# Altium PCB sensors11.PcbDoc
Units mm, origin at the board's own origin, x right, y up, seen from the top; angles counter-clockwise.
Board outline 100 x 100 mm, 2 copper layers (Top Layer, Bottom Layer); 17 components, 18 nets, 105 pads, 0 vias.
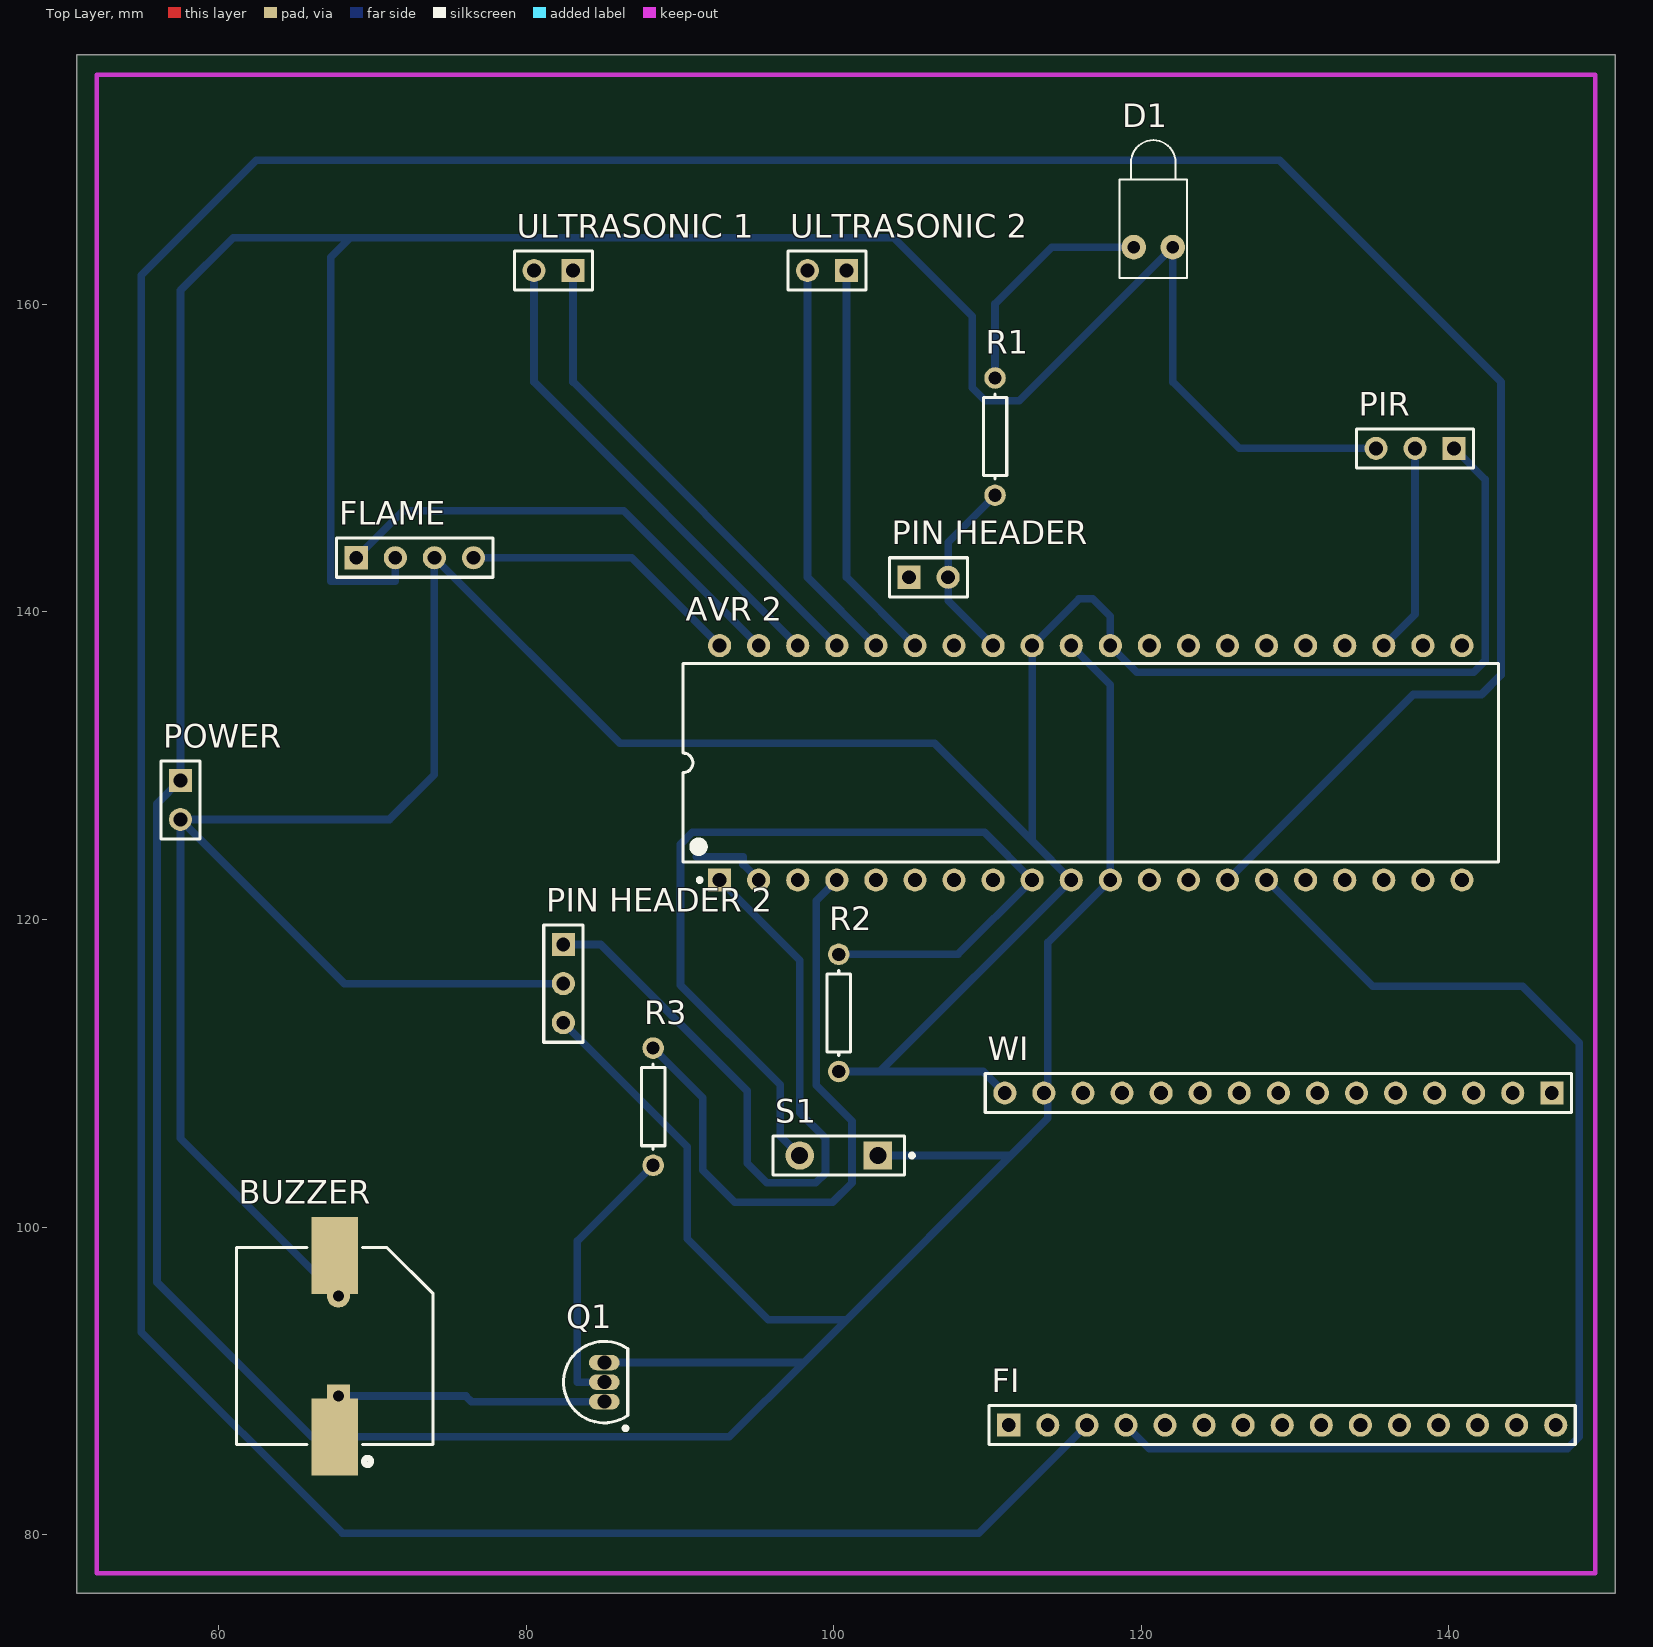
[diagram p0: Top Layer view]
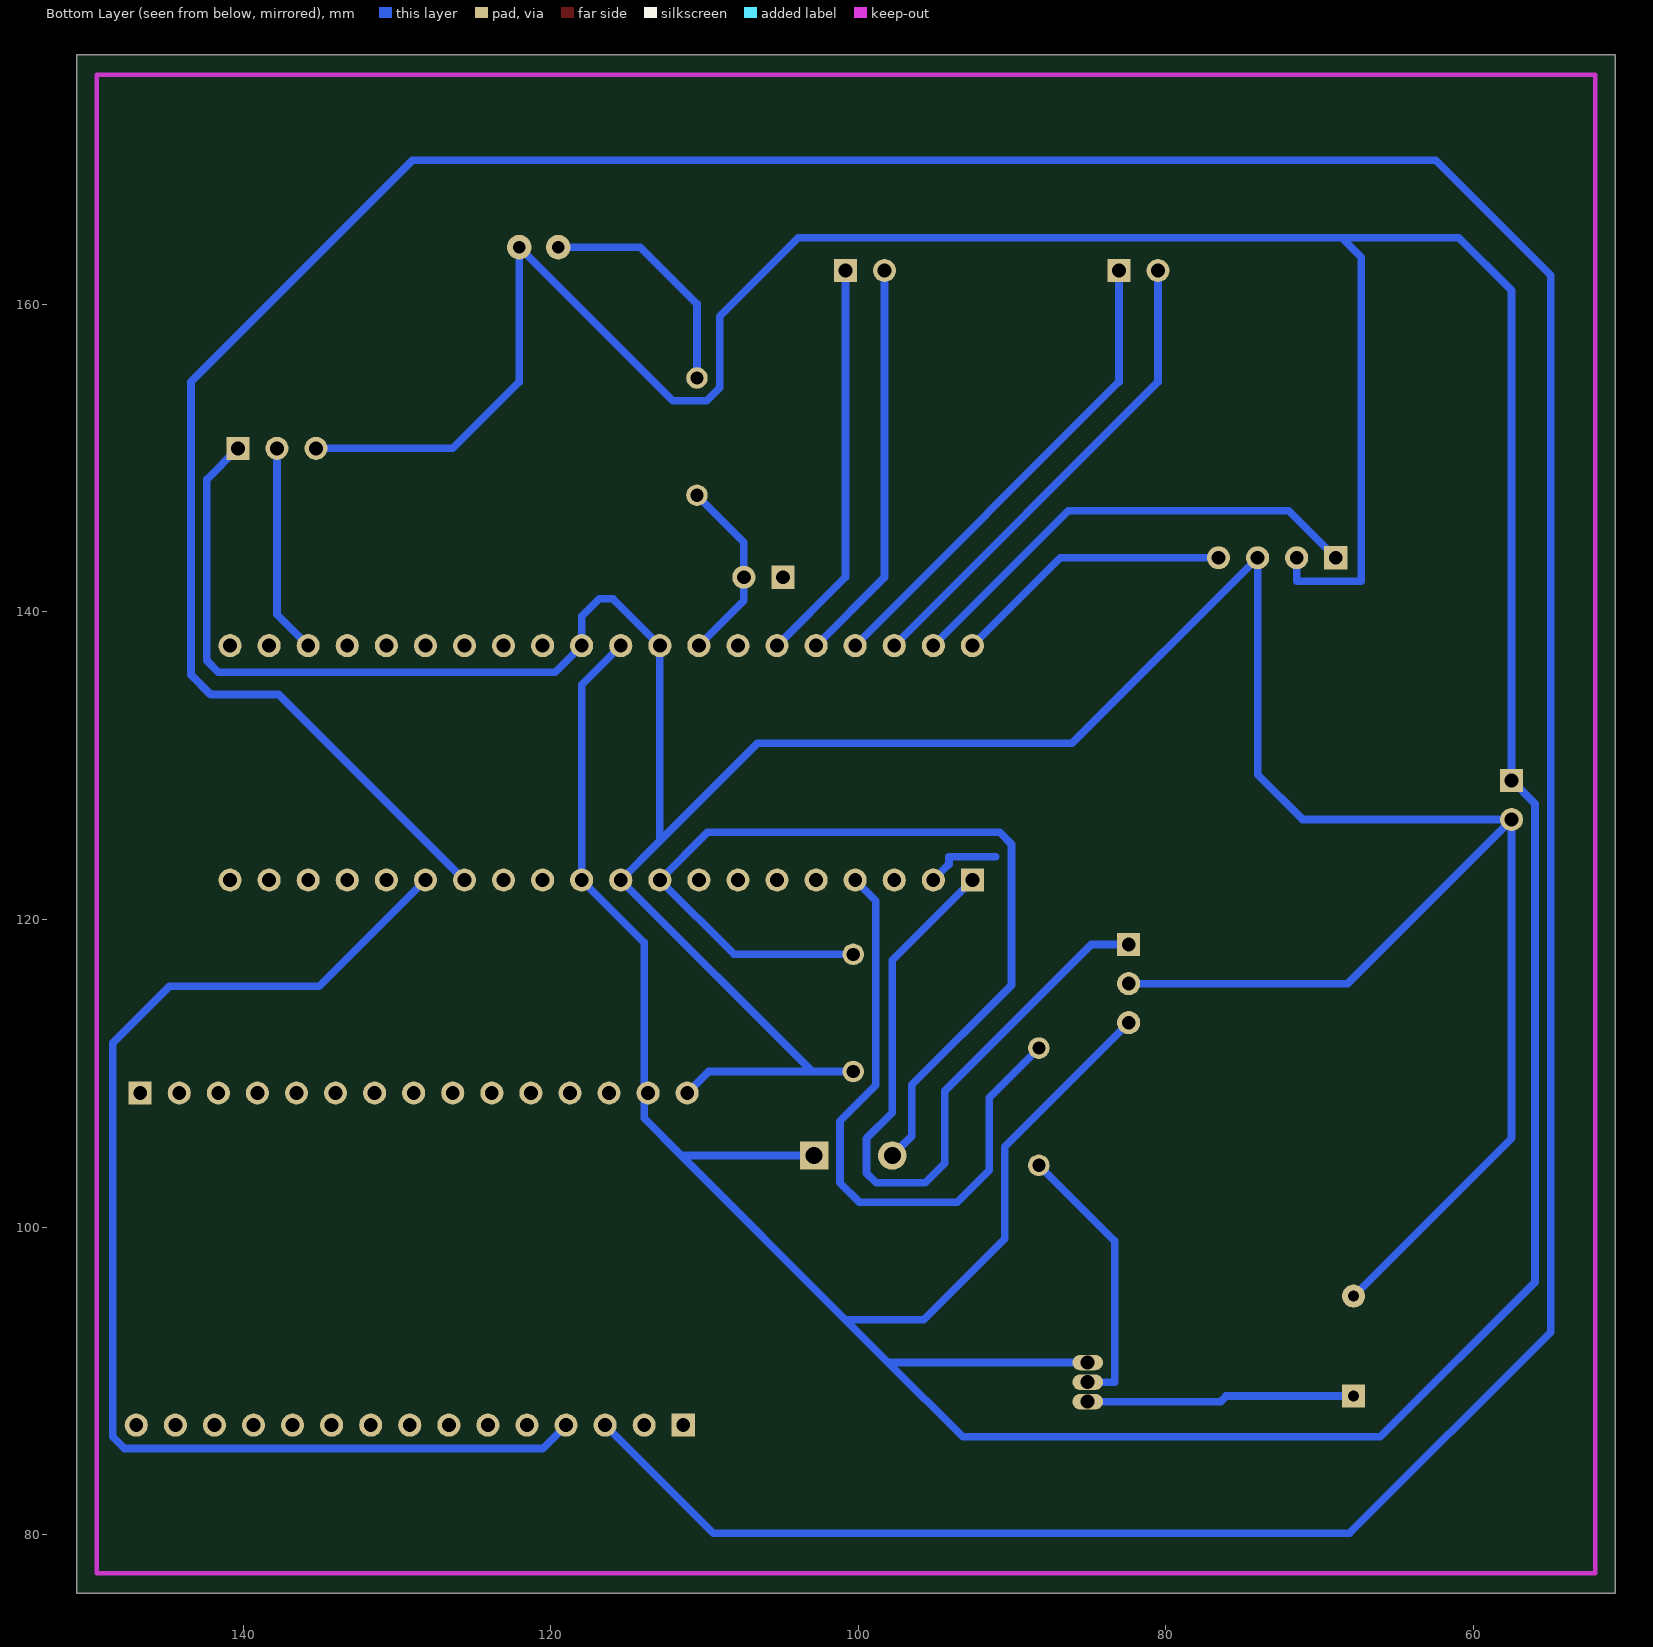
[diagram p1: Bottom Layer view, seen from below]

## Layer stack, top to bottom
Top Solder: solder mask 0.0102, Solder Resist, Dk 3.5
Top Layer: signal copper 0.0356
Dielectric 1: dielectric 0.32, FR-4, Dk 4.8
Bottom Layer: signal copper 0.0356
Bottom Solder: solder mask 0.0102, Solder Resist, Dk 3.5

## Board outline
50.8,76.2 150.8,76.2 150.8,176.2 50.8,176.2

## Design rules (kind name [scope] priority, off if disabled: settings)
Clearance [All] p1: gap=0.5
PolygonConnect [All] p1: connectstyle=Relief reliefconductorwidth=0.254 reliefentries=4 polygonreliefangle="90 Angle" airgapwidth=0.254
RoomDefinition sensors-1 [InComponentClass('sensors-1')] p1: confinementstyle=ConfineIn formatcopy=TRUE lockcomponents=FALSE outline 152.019,77.724 316.611,77.724 316.611,133.858 152.019,133.858
RoutingVias [All] p1: holewidth=0.6 width=1 viastyle="Through Hole" minholewidth=0.711 minwidth=1.27 maxholewidth=0.711 maxwidth=1.27
SolderMaskExpansion [All] p1: expansion=0.102
Width [All] p1: maxlimit=0.5 minlimit=0.5 preferedwidth=0.5
30 further rules are at their usual default settings.

## Components (designator, comment, footprint, x,y, rotation, side; value= is the part's Value field where it differs from the comment)
"AVR 2" "ATmega16A-PU" 40P6 116.713,130.175 r90 top
BUZZER "Buzzer" ABSM-1574 67.564,86.36 r90 top
D1 "LED1" LED-1 120.777,163.703 r90 top
FI "wifi module" HDR1X15 111.379,87.122 r0 top
FLAME "Header 4" HDR1X4 68.961,143.51 r0 top
"PIN HEADER" "Header 2" HDR1X2 104.902,142.24 r0 top
"PIN HEADER 2" "Header 3" HDR1X3 82.423,118.364 r270 top
PIR "Header 3" HDR1X3 140.335,150.622 r180 top
POWER "Header 2" HDR1X2 57.531,129.032 r270 top
Q1 "NPN" TO-226-AA 85.09,89.916 r0 top
R1 "Res1" AXIAL-0.3 110.49,151.384 r90 top
R2 "Res1" AXIAL-0.3 100.33,113.919 r270 top
R3 "Res1" AXIAL-0.3 88.265,107.823 r90 top
S1 "SW-PB" SPST-2 100.33,104.648 r180 top
"ULTRASONIC 1" "Header 2" HDR1X2 83.058,162.179 r180 top
"ULTRASONIC 2" "Header 2" HDR1X2 100.838,162.179 r180 top
WI "wifi module" HDR1X15 146.685,108.712 r180 top

## Footprints (in the part's own frame and the unit in brackets; to place one, negate y for a bottom-side part, rotate by r counter-clockwise, add the part's x,y. Pads: shape width x height; smd on the part's side, far side on the other; paste and mask are expansions set on the pad)
40P6 [mm] "DIP, 40-Leads, Row Spacing 15.24mm, Pitch 2.54mm, Body 52.2x13.95mm"
  rect 1.5x1.5 hole 0.9: 1(-7.62,24.13)
  round 1.5 hole 0.9: 2(-7.62,21.59) 3(-7.62,19.05) 4(-7.62,16.51) 5(-7.62,13.97) 6(-7.62,11.43) 7(-7.62,8.89) 8(-7.62,6.35) 9(-7.62,3.81) 10(-7.62,1.27) 11(-7.62,-1.27) 12(-7.62,-3.81) 13(-7.62,-6.35) 14(-7.62,-8.89) 15(-7.62,-11.43) 16(-7.62,-13.97) 17(-7.62,-16.51) 18(-7.62,-19.05) 19(-7.62,-21.59) 20(-7.62,-24.13) 21(7.62,-24.13) 22(7.62,-21.59) 23(7.62,-19.05) 24(7.62,-16.51) 25(7.62,-13.97) 26(7.62,-11.43) 27(7.62,-8.89) 28(7.62,-6.35) 29(7.62,-3.81) 30(7.62,-1.27) 31(7.62,1.27) 32(7.62,3.81) 33(7.62,6.35) 34(7.62,8.89) 35(7.62,11.43) 36(7.62,13.97) 37(7.62,16.51) 38(7.62,19.05) 39(7.62,21.59) 40(7.62,24.13)
  silkscreen extent -7.74,-26.5 6.45,26.5, body extent -7.05,-26.47 7.05,26.47, height 4.83
ABSM-1574 [mm] "Magnetic Transducer Buzzer"
  rect 5x3 smd: 1(0,0) 2(11.8,0)
  rect 1.5x1.5 hole 0.7: 1A(2.65,-0.24)
  round 1.5 hole 0.7: 2A(9.15,-0.24)
  silkscreen extent -1.83,-6.4 12.3,6.4
AXIAL-0.3 [mm] "Axial Device, Thru-Hole; 2 Leads; 0.3 in Pin Spacing"
  round 1.4 hole 0.85: 1(-3.81,0) 2(3.81,0)
  silkscreen extent -2.77,-0.76 2.77,0.76
HDR1X2 [mm] "Connector; Header; 2 Position"
  rect 1.5x1.5 hole 0.9: 1(0,0)
  round 1.5 hole 0.9: 2(2.54,0)
  silkscreen extent -1.27,-1.27 3.81,1.27
HDR1X3 [mm] "Connector; Header; 3 Position"
  rect 1.5x1.5 hole 0.9: 1(0,0)
  round 1.5 hole 0.9: 2(2.54,0) 3(5.08,0)
  silkscreen extent -1.27,-1.27 6.35,1.27
HDR1X4 [mm] "Connector; Header; 4 Position"
  rect 1.5x1.5 hole 0.9: 1(0,0)
  round 1.5 hole 0.9: 2(2.54,0) 3(5.08,0) 4(7.62,0)
  silkscreen extent -1.27,-1.27 8.89,1.27
HDR1X15 [mm] "Connector; Header; 15 Position"
  rect 1.5x1.5 hole 0.9: 1(0,0)
  round 1.5 hole 0.9: 2(2.54,0) 3(5.08,0) 4(7.62,0) 5(10.16,0) 6(12.7,0) 7(15.24,0) 8(17.78,0) 9(20.32,0) 10(22.86,0) 11(25.4,0) 12(27.94,0) 13(30.48,0) 14(33.02,0) 15(35.56,0)
  silkscreen extent -1.27,-1.27 36.83,1.27
LED-1 [mm] "LED; 2 Leads"
  round 1.6 hole 0.8: 1(0,1.27) 2(0,-1.27)
  silkscreen extent -2,-2.2 6.95,2.2
SPST-2 [mm] "Switch; 2 Leads"
  rect 1.85x1.85 hole 1.1: 1(-2.54,0)
  round 1.85 hole 1.1: 2(2.54,0)
  silkscreen extent -4.89,-1.27 4.28,1.27
TO-226-AA [mm] "TO, Flat Index; 3 In-Line, Axial Leads; Body Dia. 4.8mm; Leads 0.55 x 0.51 mm (max)"
  oval 2x1 hole 0.9: 1(0,-1.27) 2(0,0) 3(0,1.27)
  silkscreen extent -2.65,-3.13 1.52,2.65, body extent -2.65,-2.66 1.52,2.66, height 5.33

## Part data
"AVR 2": "8-bit AVR Microcontroller, 16KB Flash, 512 Bytes EEPROM, 1KB SRAM, 40-pin PDIP, Industrial Grade (-40°C to 85°C)"
BUZZER: "Magnetic Transducer Buzzer"
D1: "Typical RED GaAs LED"
FI WI: library part "Header 15", "Header, 15-Pin"
FLAME: "Header, 4-Pin"
"PIN HEADER" POWER "ULTRASONIC 1" "ULTRASONIC 2": "Header, 2-Pin"
"PIN HEADER 2" PIR: "Header, 3-Pin"
Q1: "NPN Bipolar Transistor"
R1 R2 R3: "Resistor"
S1: "Switch"

## Nets (pads, with @x,y where several pads share a name; then routed paths per layer and width w, separated by ;. In a path a pad name is that pad's centre, name@x,y a point inside that pad or via, vN(x,y) a via of type N, cw(c..) or ccw(c..) an arc to the next point about the centre after c; other vN are vias at no path point)
GND: "AVR 2.11" "AVR 2.31" "PIN HEADER 2.3" D1.2 FLAME.2 PIR.3 POWER.1 Q1.3 S1.1 WI.14 | length 350.6
  Bottom Layer w0.5: FLAME.2 71.501,141.986 67.31,141.986 67.31,163.043 68.58,164.313 ; 82.423,113.284 90.488,105.219 90.488,99.25 95.758,93.98 100.838,93.98 ; Q1.3 98.044,91.186 ; S1.1 111.506,104.648 ; WI.14 WI.14@113.919,108.966 ; 115.443,137.795 117.983,135.255 117.983,122.555 113.919,118.491 WI.14@113.919,108.966 ; PIR.3 126.365,150.622 122.047,154.94 D1.2 112.065,153.721 109.855,153.721 109.017,154.559 109.017,159.207 103.911,164.313 68.58,164.313 ; 68.58,164.313 60.96,164.313 57.531,160.884 POWER.1 56.007,127.508 56.007,96.418 66.065,86.36 93.218,86.36 98.044,91.186 ; 98.044,91.186 100.838,93.98 ; 100.838,93.98 111.506,104.648 ; 111.506,104.648 113.919,107.061 113.919,108.712 WI.14@113.919,108.966
"NetAVR 2_1": "AVR 2.1" "PIN HEADER 2.1" | length 48.4
  Bottom Layer w0.5: 82.423,118.364 84.861,118.364 94.385,108.84 94.385,104.14 95.655,102.87 98.83,102.87 99.465,103.505 99.465,105.76 97.79,107.435 97.79,117.348 92.583,122.555
"NetAVR 2_4": "AVR 2.4" R3.2 | length 41.6
  Bottom Layer w0.5: R3.2 91.488,108.41 91.488,103.686 93.574,101.6 99.924,101.6 101.194,102.87 101.194,106.883 98.857,109.22 98.857,121.209 100.203,122.555
"NetAVR 2_9": "AVR 2.9" R2.1 S1.2 | length 62.5
  Bottom Layer w0.5: S1.2 96.52,105.918 96.52,109.254 90.043,115.731 90.043,124.892 90.805,125.654 109.804,125.654 112.903,122.555 108.077,117.729 R2.1
"NetAVR 2_14": "AVR 2.14" FI.3 | length 278.3
  Bottom Layer w0.5: FI.3 109.423,80.086 68.072,80.086 54.991,93.167 54.991,161.874 62.459,169.342 128.981,169.342 143.383,154.94 143.383,135.89 142.113,134.62 137.668,134.62 125.603,122.555
"NetAVR 2_15": "AVR 2.15" FI.4 | length 80.7
  Bottom Layer w0.5: FI.4 120.523,85.598 147.701,85.598 148.463,86.36 148.463,111.963 144.78,115.646 135.052,115.646 128.143,122.555
"NetAVR 2_23": "AVR 2.23" PIR.2 | length 13.7
  Bottom Layer w0.5: 135.763,137.795 137.795,139.827 PIR.2
"NetAVR 2_33": "AVR 2.33" "PIN HEADER.2" R1.1 | length 12.3
  Bottom Layer w0.5: 110.363,137.795 107.442,140.716 107.442,142.24 107.442,144.526 R1.1
"NetAVR 2_35": "AVR 2.35" "ULTRASONIC 2.1" | length 26.2
  Bottom Layer w0.5: 100.838,162.179 100.838,142.24 105.283,137.795
"NetAVR 2_37": "AVR 2.37" "ULTRASONIC 1.1" | length 31.5
  Bottom Layer w0.5: 83.058,162.179 83.058,154.94 100.203,137.795
"NetAVR 2_39": "AVR 2.39" FLAME.1 | length 31.1
  Bottom Layer w0.5: FLAME.1 72.009,146.558 86.36,146.558 95.123,137.795
"NetAVR 2_40": "AVR 2.40" FLAME.4 | length 18.4
  Bottom Layer w0.5: FLAME.4 86.868,143.51 92.583,137.795
NetBUZZER_1: BUZZER.1 BUZZER.1A Q1.1 | length 17.4
  Bottom Layer w0.5: BUZZER.1A 76.09,89.01 76.454,88.646 Q1.1
NetD1_1: D1.1 R1.2 | length 15.4
  Bottom Layer w0.5: R1.2 110.49,160.02 114.173,163.703 D1.1
NetQ1_2: Q1.2 R3.1 | length 17.9
  Bottom Layer w0.5: Q1.2 83.337,89.916 83.337,99.085 R3.1
"TRIG 1": "AVR 2.38" "ULTRASONIC 1.2" | length 31.5
  Bottom Layer w0.5: 80.518,162.179 80.518,154.94 97.663,137.795
"TRIG 2": "AVR 2.36" "ULTRASONIC 2.2" | length 26.2
  Bottom Layer w0.5: 98.298,162.179 98.298,142.24 102.743,137.795
VCC: "AVR 2.10" "AVR 2.30" "AVR 2.32" "PIN HEADER 2.2" BUZZER.2 BUZZER.2A FLAME.3 PIR.1 POWER.2 R2.2 WI.15 | length 236.9
  Bottom Layer w0.5: BUZZER.2A 57.531,105.783 POWER.2 ; 82.423,115.824 68.199,115.824 POWER.2 ; R2.2 102.997,110.109 ; WI.15 109.728,110.109 102.997,110.109 ; PIR.1 142.367,148.59 142.367,136.83 141.605,136.068 119.71,136.068 117.983,137.795 117.983,139.7 116.84,140.843 115.951,140.843 112.903,137.795 112.903,125.095 ; POWER.2 71.12,126.492 74.041,129.413 FLAME.3 86.106,131.445 106.553,131.445 112.903,125.095 ; 102.997,110.109 115.443,122.555 112.903,125.095
pads on no net: "AVR 2.2" "AVR 2.3" "AVR 2.5" "AVR 2.6" "AVR 2.7" "AVR 2.8" "AVR 2.12" "AVR 2.13" "AVR 2.16" "AVR 2.17" "AVR 2.18" "AVR 2.19" "AVR 2.20" "AVR 2.21" "AVR 2.22" "AVR 2.24" "AVR 2.25" "AVR 2.26" "AVR 2.27" "AVR 2.28" "AVR 2.29" "AVR 2.34" "PIN HEADER.1" FI.1 FI.2 FI.5 FI.6 FI.7 FI.8 FI.9 FI.10 FI.11 FI.12 FI.13 FI.14 FI.15 WI.1 WI.2 WI.3 WI.4 WI.5 WI.6 WI.7 WI.8 WI.9 WI.10 WI.11 WI.12 WI.13
copper on no net: | length 5
  Bottom Layer w0.5: 91.059,124.079 94.107,124.079 94.107,123.571 95.123,122.555

## Keep-outs
Keep-Out Layer:
  lines w0.3: 52.1,77.5 52.1,174.9 149.5,174.9 149.5,77.5 52.1,77.5

## Silkscreen, mask and mechanical layers (free items; w line width, h text height)
Mechanical 4:
  lines w0.254: 144.018,191.643 144.018,193.167 141.859,195.326 141.097,195.326 141.224,195.199 141.224,195.072 141.351,194.945 141.351,194.691 140.716,195.326 143.637,195.326 144.018,195.707 145.796,195.707 157.353,184.15
Drill Drawing:
  text ".LEGEND" at 155.88,81.28 h1.52
  text "Drill Drawing." at 155.88,78.74 h1.52

## Dimensions
52.1,77.5 to 52.1,174.9 on Mechanical 1
52.1,77.5 to 149.5,77.5 on Mechanical 1